# Altium PCB doline_pcb.PcbDoc
Units mm, origin at the board's own origin, x right, y up, seen from the top; angles counter-clockwise.
Board outline 112.39 x 65.33 mm, 2 copper layers (Top Layer, Bottom Layer); 34 components, 38 nets, 83 pads, 0 vias.
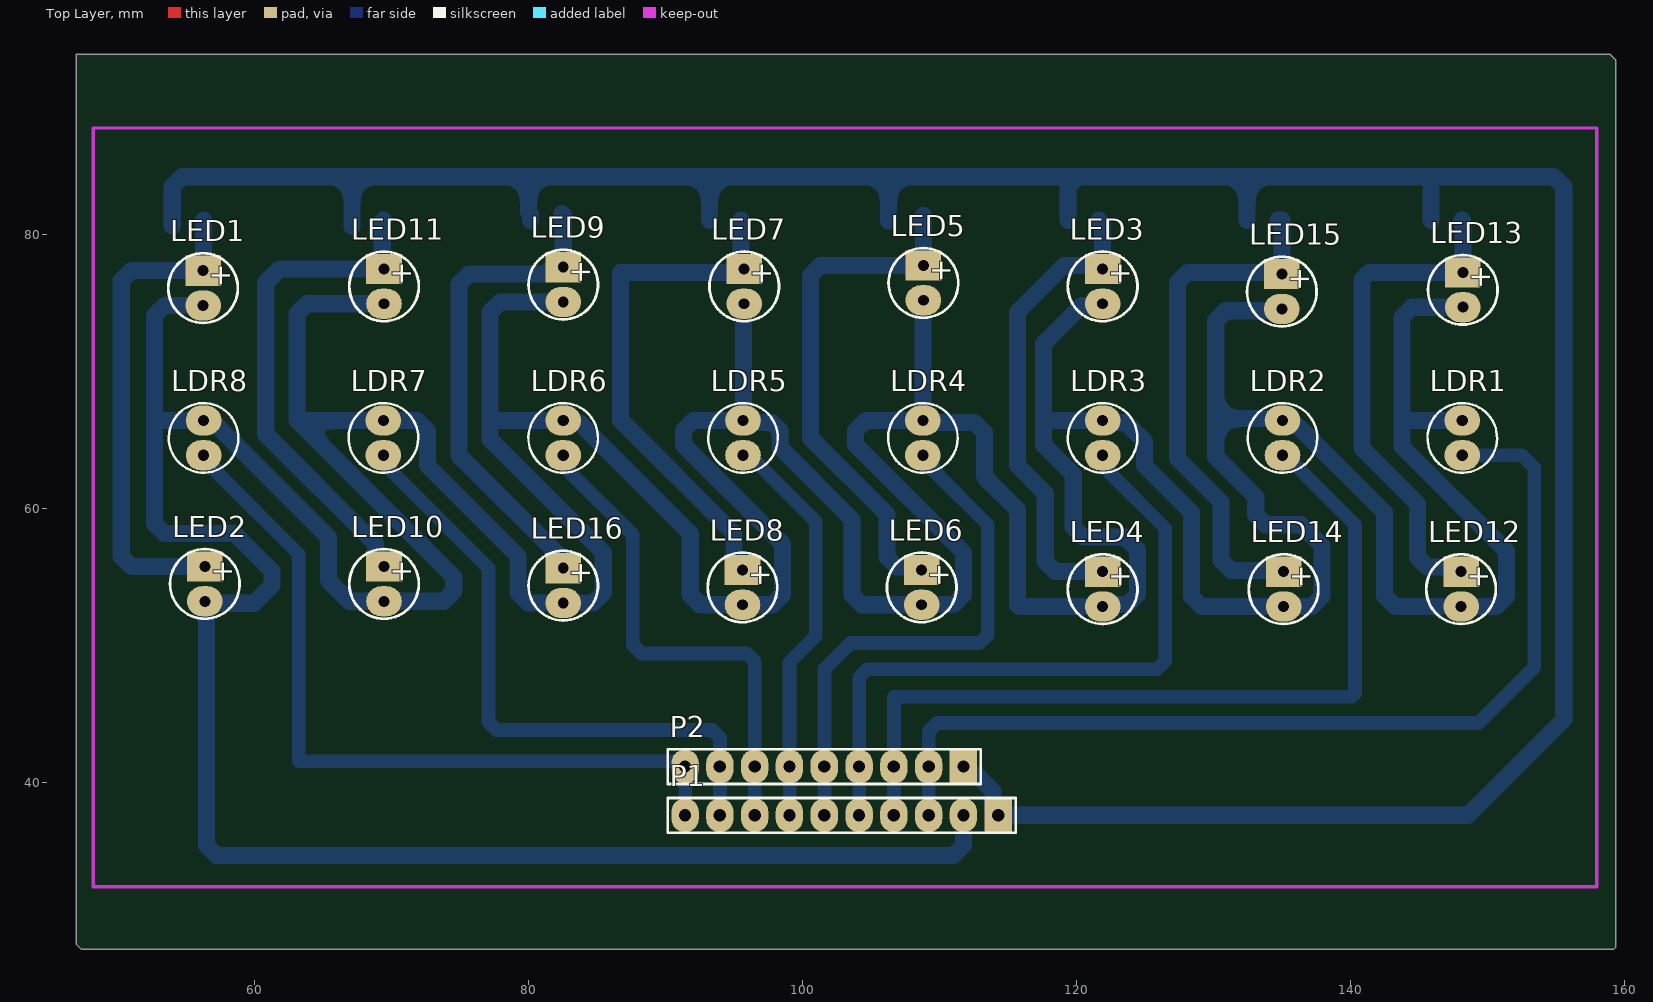
[diagram p0: Top Layer view]
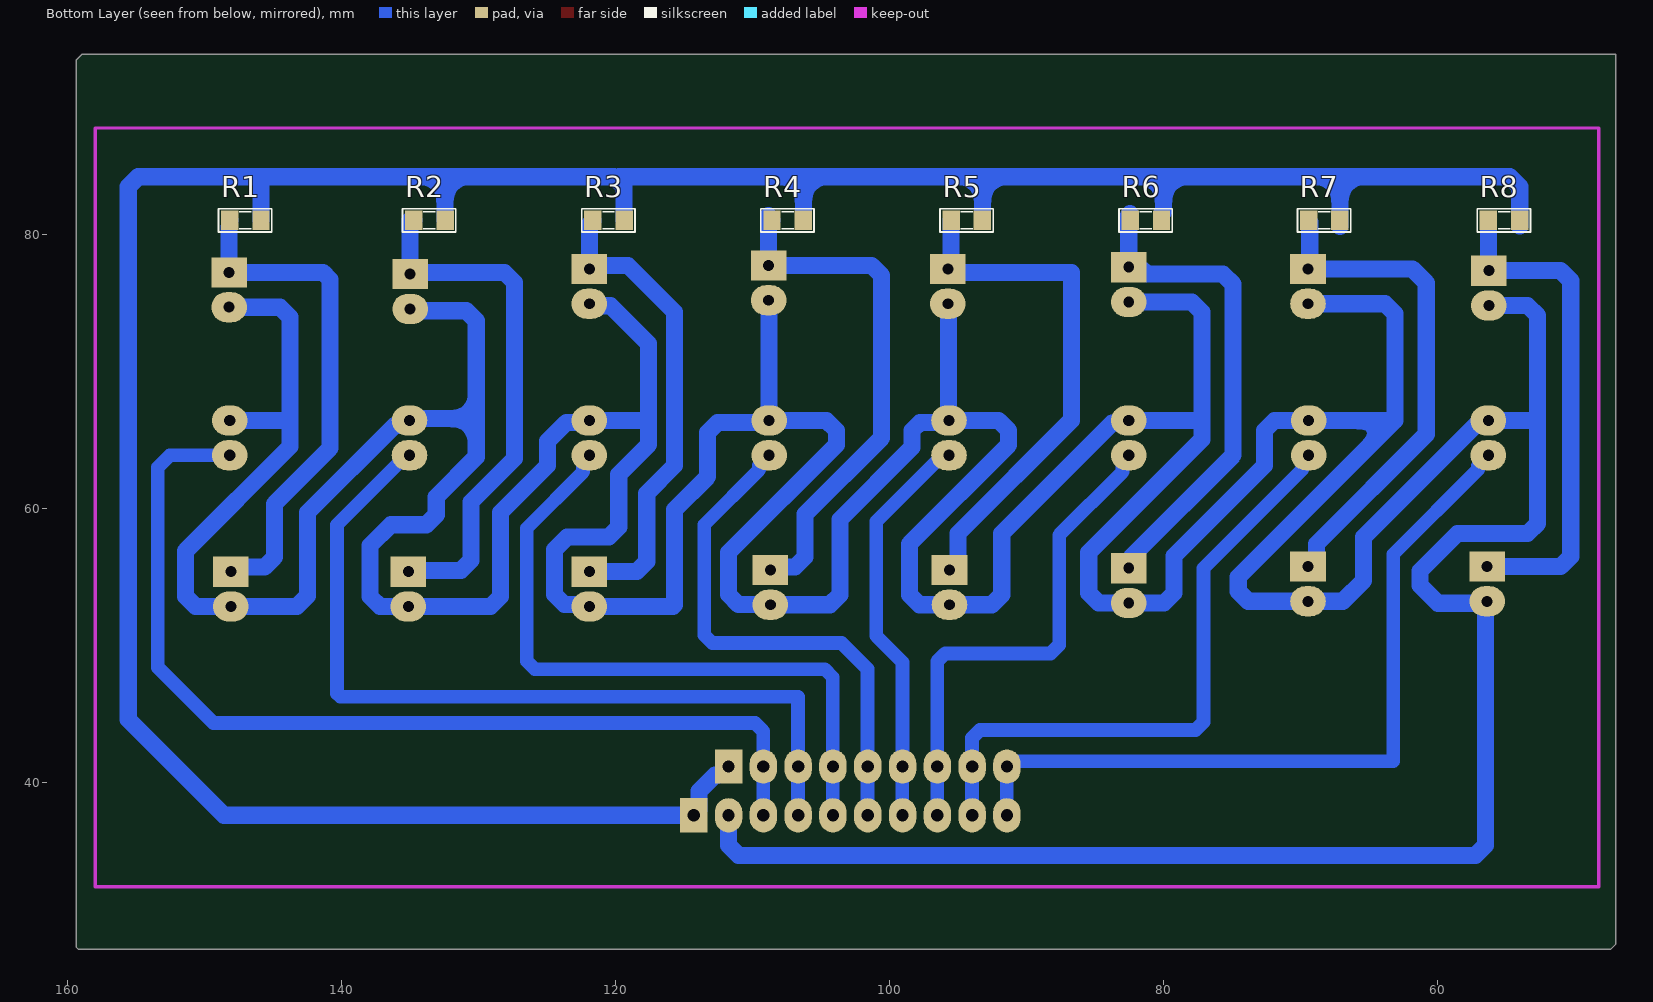
[diagram p1: Bottom Layer view, seen from below]
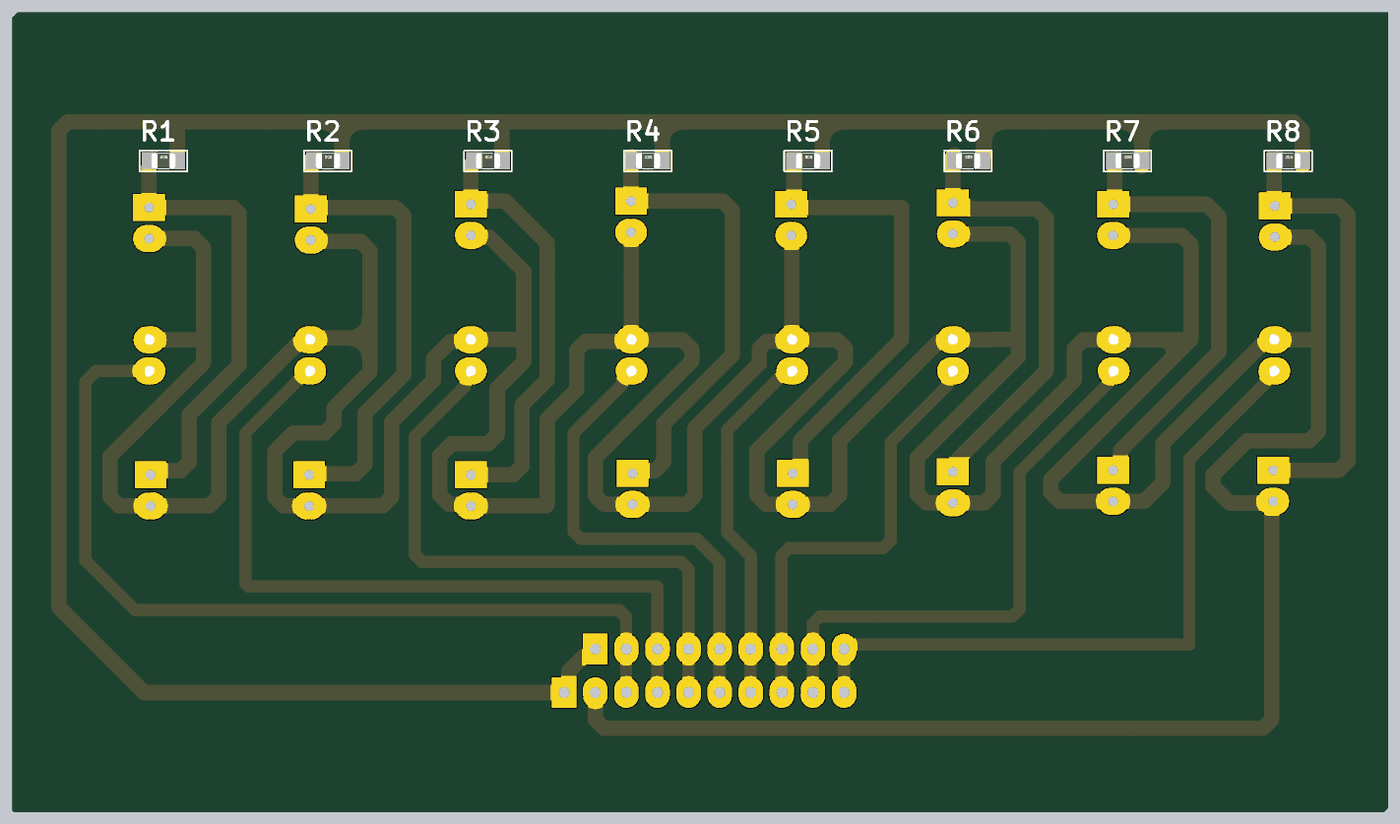
[diagram p2: 3D render of the assembled board from below, using the file's embedded part models]

## Layer stack, top to bottom
Top Solder: solder mask 0.0102, Solder Resist, Dk 3.5
Top Layer: signal copper 0.0356
Dielectric 1: dielectric 0.32, FR-4, Dk 4.8
Bottom Layer: signal copper 0.0356
Bottom Solder: solder mask 0.0102, Solder Resist, Dk 3.5

## Board outline
46.99,28.194 47.361,27.823 159.236,27.823 159.385,27.972 159.385,92.71 158.94,93.154 46.99,93.154

## Design rules (kind name [scope] priority, off if disabled: settings)
Clearance [All] p1: gap=0.254 ignorepadtopadclearanceinfootprint=FALSE except(0: Arc-Hole Track-Hole SMDPad-Hole THPad-Hole Via-Hole Fill-Hole Poly-Hole Region-Hole Text-Hole)
PolygonConnect [All] p1: connectstyle=Relief reliefconductorwidth=0.254 reliefentries=4 polygonreliefangle="90 Angle" airgapwidth=0.254
RoutingVias [All] p1: holewidth=0.711 width=1.27 viastyle="Through Hole" minholewidth=0.711 minwidth=1.27 maxholewidth=0.711 maxwidth=1.27
SolderMaskExpansion [All] p1: expansion=0.102 istentingtop=FALSE
Width [All] p1: maxlimit=1.5 minlimit=0.254 preferedwidth=1.25 toplayer_maxwidth=0.254 toplayer_prefwidth=0.254 bottomlayer_minwidth=1 minimp=50.000000 maximp=50.000000 favimp=50.000000
30 further rules are at their usual default settings.

## Components (designator, comment, footprint, x,y, rotation, side; value= is the part's Value field where it differs from the comment)
LDR1 "LDR" CDS 148.169,66.408 r270 top
LDR2 "LDR" CDS 135.045,66.408 r270 top
LDR3 "LDR" CDS 121.92,66.408 r270 top
LDR4 "LDR" CDS 108.796,66.408 r270 top
LDR5 "LDR" CDS 95.671,66.408 r270 top
LDR6 "LDR" CDS 82.546,66.408 r270 top
LDR7 "LDR" CDS 69.422,66.408 r270 top
LDR8 "LDR" CDS 56.297,66.408 r270 top
LED1 "LED5" LED5MM 56.261,77.343 r270 top
LED2 "LED5" LED5MM 56.388,55.753 r270 top
LED3 "LED5" LED5MM 121.92,77.47 r270 top
LED4 "LED5" LED5MM 121.92,55.372 r270 top
LED5 "LED5" LED5MM 108.839,77.724 r270 top
LED6 "LED5" LED5MM 108.712,55.499 r270 top
LED7 "LED5" LED5MM 95.758,77.47 r270 top
LED8 "LED5" LED5MM 95.631,55.499 r270 top
LED9 "LED5" LED5MM 82.55,77.597 r270 top
LED10 "LED5" LED5MM 69.469,55.753 r270 top
LED11 "LED5" LED5MM 69.469,77.47 r270 top
LED12 "LED5" LED5MM 148.082,55.372 r270 top
LED13 "LED5" LED5MM 148.209,77.216 r270 top
LED14 "LED5" LED5MM 135.128,55.372 r270 top
LED15 "LED5" LED5MM 135.001,77.089 r270 top
LED16 "LED5" LED5MM 82.55,55.626 r270 top
P1 "Header 10_1" HDR1X10 114.3,37.592 r180 top
P2 "Header 9_1" HDR1X9 111.76,41.148 r180 top
R1 "RESISTOR SMD" RES-SM-0805 148.169,81.026 r180 bottom value=220
R2 "RESISTOR SMD" RES-SM-0805 134.737,81.026 r180 bottom value=220
R3 "RESISTOR SMD" RES-SM-0805 121.664,81.026 r180 bottom value=220
R4 "RESISTOR SMD" RES-SM-0805 108.59,81.026 r180 bottom value=220
R5 "RESISTOR SMD" RES-SM-0805 95.517,81.026 r180 bottom value=220
R6 "RESISTOR SMD" RES-SM-0805 82.444,81.026 r180 bottom value=220
R7 "RESISTOR SMD" RES-SM-0805 69.422,81.026 r180 bottom value=220
R8 "RESISTOR SMD" RES-SM-0805 56.297,81.026 r180 bottom value=220

## Footprints (in the part's own frame and the unit in brackets; to place one, negate y for a bottom-side part, rotate by r counter-clockwise, add the part's x,y. Pads: shape width x height; smd on the part's side, far side on the other; paste and mask are expansions set on the pad)
CDS [mm] "QUANG TRO"
  oval 2.2x2.6 hole 0.813: 1(0,0) 2(2.54,0)
  silkscreen extent -1.27,-2.54 3.81,2.54, body extent -1.33,-2.03 3.88,2.27, height 3.51
HDR1X9 [mm]
  rect 2x2.5 hole 0.9: 1(0,0)
  oval 2x2.5 hole 0.9: 2(2.54,0) 3(5.08,0) 4(7.62,0) 5(10.16,0) 6(12.7,0) 7(15.24,0) 8(17.78,0) 9(20.32,0)
  silkscreen extent -1.27,-1.27 21.59,1.27, body extent -1.27,-1.27 21.59,1.27, height 8.89
HDR1X10 [mm]
  rect 2x2.5 hole 0.9: 1(0,0)
  oval 2x2.5 hole 0.9: 2(2.54,0) 3(5.08,0) 4(7.62,0) 5(10.16,0) 6(12.7,0) 7(15.24,0) 8(17.78,0) 9(20.32,0) 10(22.86,0)
  silkscreen extent -1.27,-1.27 24.13,1.27, body extent -1.27,-1.27 24.13,1.27, height 8.89
LED5MM [mm]
  rect 2.2x2.6 hole 0.8: 1(0,0)
  oval 2.2x2.6 hole 0.8: 2(2.54,0)
  silkscreen extent -1.27,-2.54 3.81,2.54
RES-SM-0805 [mil]
  rect 50x55 smd: 1(0,0) 2(90,0)
  silkscreen extent -32,-34 121,33, body extent 6,-25 84,25, height 31

## Part data
LDR1 LDR2 LDR3 LDR4 LDR5 LDR6 LDR7 LDR8: "Quang Tro"
LED1 LED2 LED3 LED4 LED5 LED6 LED7 LED8 LED9 LED10 LED11 LED12 LED13 LED14 LED15 LED16: library part "LED 5mm", "LED 5mm"
P1: "Header, 10-Pin", LatestRevisionDate=17-Jul-2002, LatestRevisionNote="Re-released for DXP Platform.", Publisher="Altium Limited"
P2: "Header, 9-Pin", LatestRevisionDate=17-Jul-2002, LatestRevisionNote="Re-released for DXP Platform.", Publisher="Altium Limited"
R1 R2 R3 R4 R5 R6 R7 R8: "Resistor"

## Nets (pads, with @x,y where several pads share a name; then routed paths per layer and width w, separated by ;. In a path a pad name is that pad's centre, name@x,y a point inside that pad or via, vN(x,y) a via of type N, cw(c..) or ccw(c..) an arc to the next point about the centre after c; other vN are vias at no path point)
5V: P1.1 P2.1 R1.2 R2.2 R3.2 R4.2 R5.2 R6.2 R7.2 R8.2 | length 215.7
  Bottom Layer w1.25: R8.2@54.011,80.609 R8.2 54.011,83.469 54.744,84.201 67.136,84.201 ; R7.2@67.136,80.56 R7.2 67.136,84.201 ; R6.2 80.148,81.036 80.148,81.486 80.01,81.623 80.01,84.201 ; R5.2 93.221,81.036 93.221,81.486 93.218,81.489 93.218,84.201 ; R4.2@106.299,80.961 106.299,84.201 ; P2.1 111.87,41.148 112.495,40.523 112.752,40.523 113.925,39.35 113.925,37.967 P1.1 148.59,37.592 155.575,44.577 155.575,83.469 154.843,84.201 145.883,84.201 ; R3.2 119.378,83.469 120.11,84.201 132.461,84.201 ; 119.936,84.026 119.761,84.201 106.299,84.201 ; R2.2 R2.2@132.461,81.036 ; R2.2@132.461,81.28 132.461,84.201 ; R1.2 145.883,84.201 ; 67.136,84.201 80.01,84.201 ; 80.01,84.201 93.218,84.201 ; 93.218,84.201 106.299,84.201 ; 132.461,84.201 145.883,84.201
12V: 
Echo: 
EnA: 
EnB: 
In1: 
In2: 
In3: 
In4: 
LDR1: 
LDR2: 
LDR3: 
LDR4: 
LDR5: 
LDR6: 
LDR7: 
LDR8: 
Line: 
Motor-: LDR1.1 LDR2.1 LDR3.1 LDR4.1 LDR5.1 LDR6.1 LDR7.1 LDR8.1 LED1.2 LED2.2 LED3.2 LED4.2 LED5.2 LED6.2 LED7.2 LED8.2 LED9.2 LED10.2 LED11.2 LED12.2 LED13.2 LED14.2 LED15.2 LED16.2 P1.2 | length 525.9
  Bottom Layer w1.25: LED1.2 53.437,74.803 52.705,74.071 52.705,66.408 ; LED11.2@69.055,75.024 68.961,74.93 63.851,74.93 63.119,74.198 63.119,66.421 63.132,66.408 ; LED9.2 77.948,75.057 77.216,74.325 77.216,66.421 ; LED7.2 95.714,74.886 95.714,66.452 LDR5.1 ; LED6.2 104.364,52.959 103.632,53.691 103.632,59.182 98.361,64.453 98.361,65.676 97.773,66.265 95.814,66.265 LDR5.1 ; LED5.2 108.817,75.162 108.817,66.43 LDR4.1 ; LED6.2@109.093,52.959 109.101,52.967 111.028,52.967 111.76,53.699 111.76,56.769 103.888,64.641 103.888,65.676 104.621,66.408 LDR4.1 ; P1.2 111.76,35.403 111.028,34.671 57.247,34.671 56.515,35.403 56.515,53.213 56.659,53.069 59.974,53.069 61.291,54.387 61.291,55.422 58.547,58.166 53.437,58.166 52.705,58.898 52.705,66.408 ; 117.592,65.689 117.592,64.653 119.771,62.474 119.771,58.634 120.503,57.902 123.536,57.902 124.46,56.978 124.46,53.708 123.728,52.976 122.064,52.976 LED4.2 115.824,52.832 115.697,52.959 115.697,59.894 113.284,62.307 113.284,65.533 112.552,66.265 108.939,66.265 LDR4.1 ; 117.602,65.699 117.602,66.421 ; LED3.2 121.776,74.786 120.379,74.786 117.602,72.009 117.602,66.421 ; LED15.2 134.874,74.422 130.907,74.422 130.175,73.69 130.175,66.548 ; LDR2.1 134.905,66.548 130.175,66.548 ; LDR2.1@135.323,66.408 135.518,66.408 135.893,66.033 136.151,66.033 142.494,59.69 142.494,53.617 143.279,52.832 LED12.2 150.652,52.832 151.384,53.564 151.384,56.896 143.764,64.516 143.764,66.122 ; LDR1.1 144.05,66.408 143.764,66.122 ; LED13.2 144.496,74.676 143.764,73.944 143.764,66.122 ; 52.705,66.408 LDR8.1 56.77,66.408 57.145,66.033 57.284,66.033 65.405,57.912 65.405,54.737 66.929,53.213 LED10.2 73.827,53.213 74.559,53.945 74.559,54.981 63.132,66.408 ; 63.132,66.408 LDR7.1 71.912,66.408 72.644,65.676 72.644,63.119 79.248,56.515 79.248,53.818 79.98,53.086 LED16.2 84.739,53.086 85.471,53.818 85.471,56.769 77.216,65.024 77.216,66.421 ; 77.216,66.421 79.389,66.421 79.401,66.408 LDR6.1 82.728,66.227 83.76,66.227 91.821,58.166 91.821,53.691 92.553,52.959 LED8.2 97.82,52.959 98.552,53.691 98.552,57.404 91.315,64.641 91.315,65.676 92.048,66.408 LDR5.1 ; 117.602,66.421 121.907,66.421 LDR3.1 122.064,66.265 123.6,66.265 124.968,64.897 124.968,63.119 128.397,59.69 128.397,53.564 129.129,52.832 LED14.2 137.19,52.832 137.922,53.564 137.922,57.277 136.398,58.801 133.828,58.801 133.096,59.533 133.096,60.833 130.175,63.754 130.175,66.548
NetLDR1_2: LDR1.2 P1.3 P2.2 | length 72.5
  Bottom Layer w1: P1.3 109.238,37.61 109.238,41.13 P2.2 109.238,41.166 109.238,43.737 109.824,44.323 149.352,44.323 153.416,48.387 153.416,62.992 152.54,63.868 LDR1.2
NetLDR2_2: LDR2.2 P1.4 P2.3 | length 62.1
  Bottom Layer w1: P1.4 106.698,37.61 106.698,41.13 P2.3 106.698,41.166 106.698,46.246 140.099,46.246 140.335,46.482 140.335,58.801 135.268,63.868 LDR2.2
NetLDR3_2: LDR3.2 P1.5 P2.4 | length 49.8
  Bottom Layer w1: P1.5 104.158,37.61 104.158,41.13 P2.4 104.158,41.166 104.158,47.674 104.744,48.26 125.906,48.26 126.492,48.846 126.492,58.547 122.381,62.658 122.381,63.407 LDR3.2
NetLDR4_2: LDR4.2 P1.6 P2.5 | length 38.7
  Bottom Layer w1: P1.6 101.618,37.61 101.618,41.13 P2.5 101.618,41.166 101.618,48.278 103.505,50.165 112.952,50.165 113.538,50.751 113.538,58.801 109.536,62.803 109.536,63.127 LDR4.2
NetLDR5_2: LDR5.2 P1.7 P2.6 | length 29.6
  Bottom Layer w1: LDR5.2 96.152,63.868 100.983,59.037 100.983,50.691 99.06,48.768 P2.6 99.078,41.13 99.078,37.61 P1.7
NetLDR6_2: LDR6.2 P1.8 P2.7 | length 36.6
  Bottom Layer w1: LDR6.2 83.008,63.407 83.008,62.661 87.63,58.039 87.63,50.024 88.251,49.403 95.952,49.403 96.538,48.817 96.538,41.166 P2.7 96.538,41.13 96.538,37.61 P1.8
NetLDR7_2: LDR7.2 P1.9 P2.8 | length 45.7
  Bottom Layer w1: LDR7.2 69.883,63.407 69.883,62.832 77.089,55.626 77.089,44.401 77.675,43.815 93.412,43.815 93.998,43.229 93.998,41.166 P2.8 93.998,41.13 93.998,37.61 P1.9
NetLDR8_2: LDR8.2 P1.10 P2.9 | length 57.1
  Bottom Layer w1: LDR8.2 57.061,63.104 57.061,62.827 63.246,56.642 63.246,41.529 91.059,41.529 P2.9 91.458,41.13 91.458,37.61 P1.10
NetLED1_1: LED1.1 LED2.1 R8.1 | length 36.3
  Bottom Layer w1.25: LED2.1@56.134,55.753 51.024,55.753 50.292,56.485 50.292,76.611 51.024,77.343 56.297,77.343 R8.1
NetLED3_1: LED3.1 LED4.1 R3.1 | length 34.8
  Bottom Layer w1.25: R3.1 121.664,80.962 121.92,80.706 LED3.1@121.92,77.724 ; LED4.1 121.911,55.381 118.461,55.381 117.729,56.113 117.729,61.087 115.697,63.119 115.697,74.325 119.096,77.724 LED3.1@121.92,77.724 ; LED3.1 LED3.1@121.92,77.724
NetLED5_1: LED5.1 LED6.1 R4.1 | length 38.4
  Bottom Layer w1.25: R4.1 R4.1@108.6,81.016 ; R4.1@108.839,81.364 LED5.1 101.316,77.724 100.584,76.992 100.584,65.151 106.172,59.563 106.172,56.444 106.904,55.712 108.88,55.712 LED6.1@109.093,55.499
NetLED7_1: LED7.1 LED8.1 R5.1 | length 38.5
  Bottom Layer w1.25: R5.1 95.527,81.016 95.527,77.701 LED7.1 95.504,77.216 86.741,77.216 86.741,66.421 95.006,58.156 95.006,55.874 95.526,55.354 LED8.1@95.776,55.354
NetLED9_1: LED9.1 LED16.1 R6.1 | length 36.5
  Bottom Layer w1.25: LED16.1@82.296,56.515 74.93,63.881 74.93,76.357 75.662,77.089 81.193,77.089 81.326,77.222 LED9.1@82.55,78.238 ; R6.1 82.454,81.016 82.454,81.5 82.55,81.403 LED9.1 LED9.1@82.55,78.238 ; LED9.1@82.55,78.105 LED9.1@82.55,78.238
NetLED10_1: LED10.1 LED11.1 R7.1 | length 36.3
  Bottom Layer w1.25: LED11.1@68.991,77.75 68.717,77.476 61.855,77.476 60.833,76.454 60.833,65.405 68.844,57.394 68.844,56.128 69.219,55.753 LED10.1 ; LED11.1@69.342,77.845 69.342,80.883 69.422,80.962 R7.1
NetLED12_1: LED12.1 LED13.1 R1.1 | length 37
  Bottom Layer w1.25: LED12.1 147.751,55.703 145.639,55.703 144.907,56.435 144.907,60.325 140.843,64.389 140.843,76.708 141.351,77.216 LED13.1 148.209,80.537 148.179,80.566 148.179,81.016 R1.1
NetLED14_1: LED14.1 LED15.1 R2.1 | length 38.1
  Bottom Layer w1.25: R2.1 R2.1@134.747,81.016 ; LED15.1 134.874,77.216 128.113,77.216 127.381,76.484 127.381,63.627 130.556,60.452 130.556,56.204 131.288,55.471 135.029,55.471 LED14.1 ; LED15.1@135.001,77.47 R2.1@135.001,81.026
Outline: 
Pin+: 
Trig: 

## Keep-outs
Keep-Out Layer:
  lines w0.254: 48.26,32.385 157.988,32.385 157.988,87.757 48.26,87.757 48.26,32.385

## Text inside footprints (layer, text, board x,y; h text height)
LED1: Top Overlay "+" at 56.896,77.851 h1.52 r270
LED2: Top Overlay "+" at 57.023,56.261 h1.52 r270
LED3: Top Overlay "+" at 122.555,77.978 h1.52 r270
LED4: Top Overlay "+" at 122.555,55.88 h1.52 r270
LED5: Top Overlay "+" at 109.474,78.232 h1.52 r270
LED6: Top Overlay "+" at 109.347,56.007 h1.52 r270
LED7: Top Overlay "+" at 96.393,77.978 h1.52 r270
LED8: Top Overlay "+" at 96.266,56.007 h1.52 r270
LED9: Top Overlay "+" at 83.185,78.105 h1.52 r270
LED10: Top Overlay "+" at 70.104,56.261 h1.52 r270
LED11: Top Overlay "+" at 70.104,77.978 h1.52 r270
LED12: Top Overlay "+" at 148.717,55.88 h1.52 r270
LED13: Top Overlay "+" at 148.844,77.724 h1.52 r270
LED14: Top Overlay "+" at 135.763,55.88 h1.52 r270
LED15: Top Overlay "+" at 135.636,77.597 h1.52 r270
LED16: Top Overlay "+" at 83.185,56.134 h1.52 r270